# Altium PCB sheet_pwm.PcbDoc
Units mm, origin at the board's own origin, x right, y up, seen from the top; angles counter-clockwise.
Board outline 152.4 x 101.6 mm, 2 copper layers (Top Layer, Bottom Layer); 14 components, 11 nets, 45 pads, 0 vias.
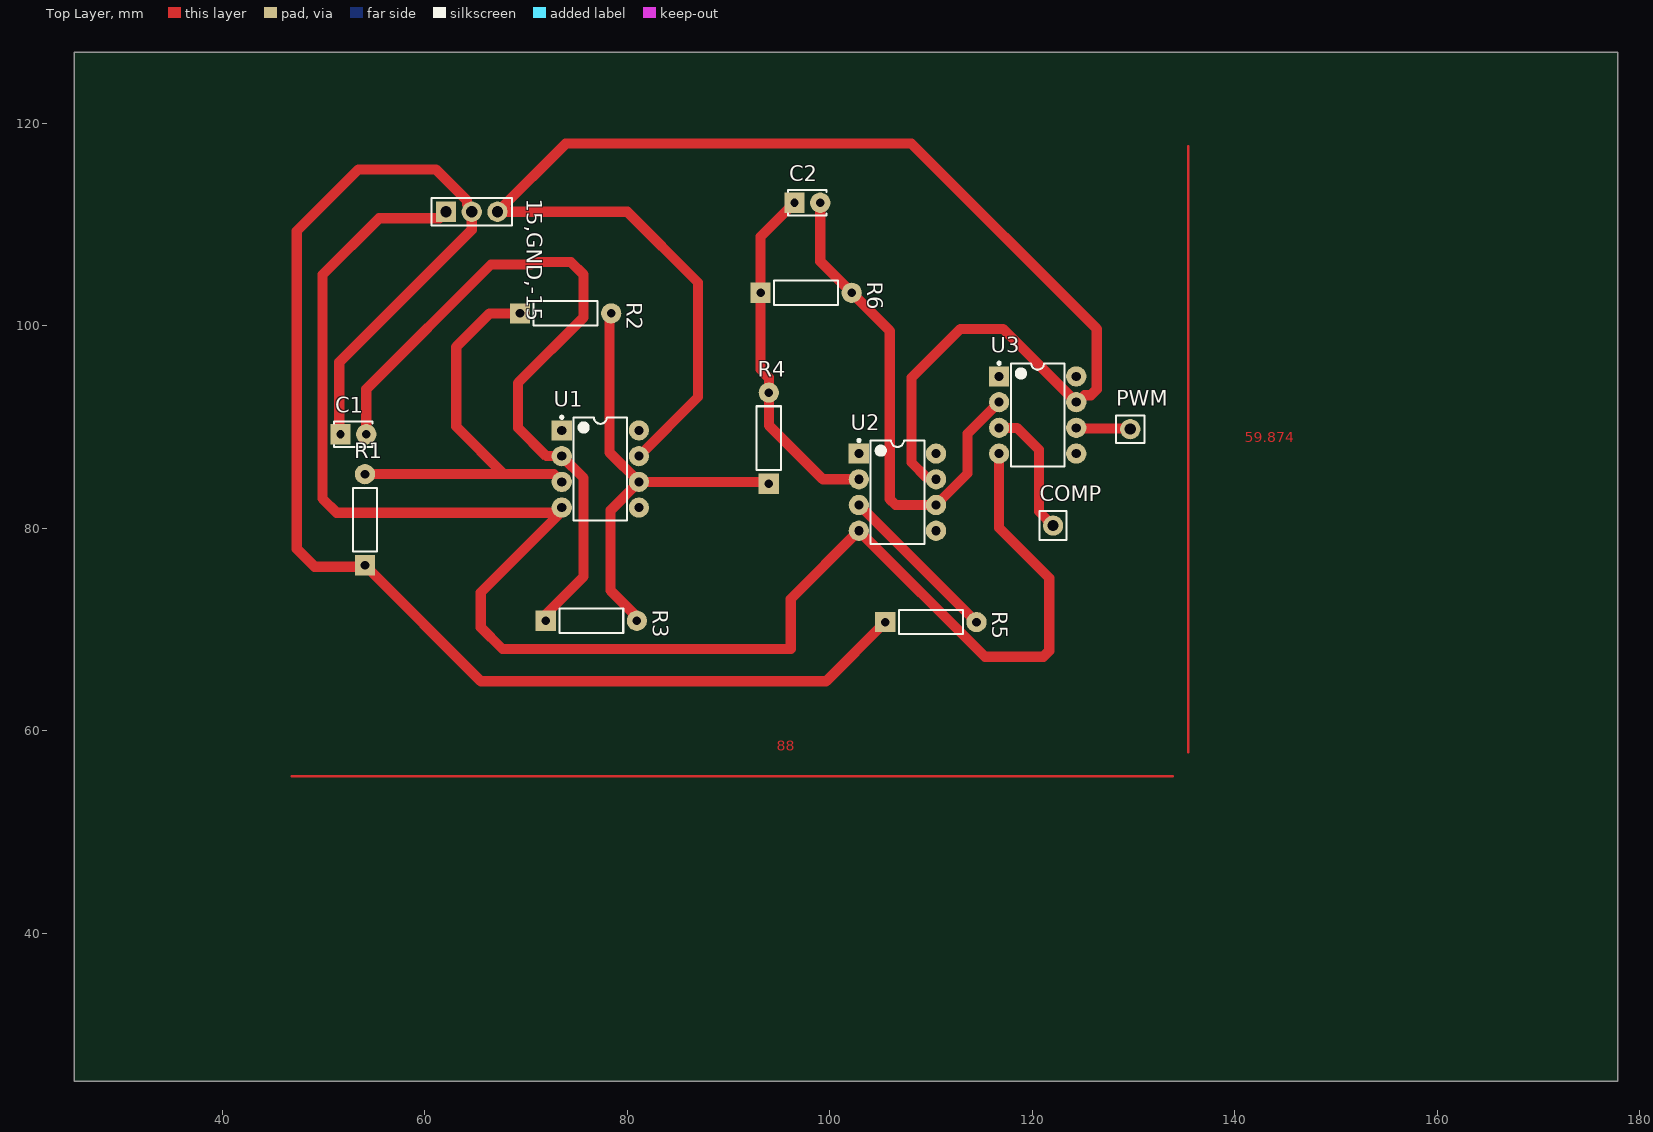
[diagram p0: Top Layer view]
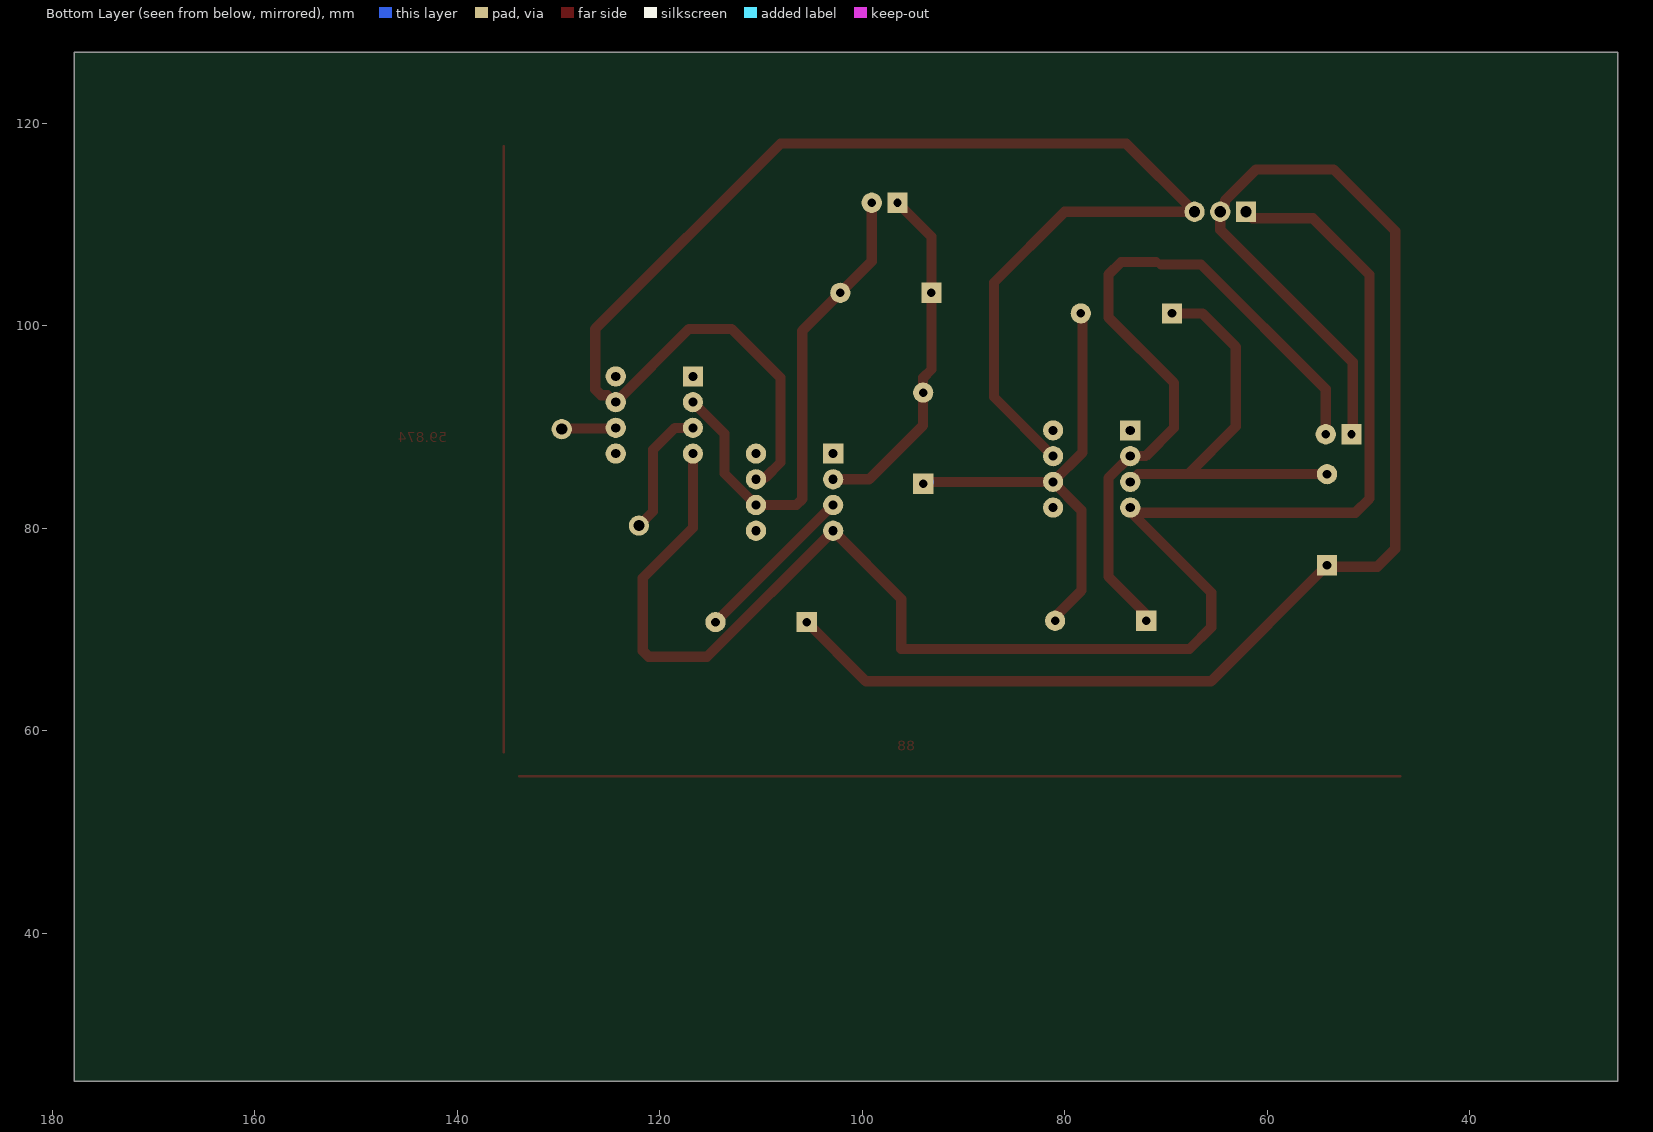
[diagram p1: Bottom Layer view, seen from below]

## Layer stack, top to bottom
Top Solder: solder mask 0.0102, Solder Resist, Dk 3.5
Top Layer: signal copper 0.0356
Dielectric 1: dielectric 0.32, FR-4, Dk 4.8
Bottom Layer: signal copper 0.0356
Bottom Solder: solder mask 0.0102, Solder Resist, Dk 3.5

## Board outline
25.4,25.4 177.8,25.4 177.8,127 25.4,127

## Design rules (kind name [scope] priority, off if disabled: settings)
Clearance [All] p1: gap=0.254 ignorepadtopadclearanceinfootprint=FALSE except(0: Arc-Hole Track-Hole SMDPad-Hole THPad-Hole Via-Hole Fill-Hole Poly-Hole Region-Hole Text-Hole)
PolygonConnect [All] p1: connectstyle=Relief reliefconductorwidth=0.254 reliefentries=4 polygonreliefangle="90 Angle" airgapwidth=0.254
RoutingVias [All] p1: holewidth=0.711 width=1.27 viastyle="Through Hole" minholewidth=0.711 minwidth=1.27 maxholewidth=0.711 maxwidth=1.27
SolderMaskExpansion [All] p1: expansion=0.102 istentingtop=FALSE
Width [All] p1: maxlimit=1 minlimit=0.254 preferedwidth=1
30 further rules are at their usual default settings.

## Classes and differential pairs
component class Sheet_pwm: 15,GND,-15 C1 C2 COMP PWM R1 R2 R3 R4 R5 R6 U1 U3

## Components (designator, comment, footprint, x,y, rotation, side; value= is the part's Value field where it differs from the comment)
15,GND,-15 "61300311121" 61300311121 64.643,111.252 r0 top
C1 "100nF" KEMT-C315-THT-2 52.959,89.281 r0 top
C2 "100nF" KEMT-C315-THT-2 97.79,112.141 r0 top
COMP "61300111121" 61300111121 122.047,80.264 r90 top
PWM "61300111121" 61300111121 129.667,89.789 r0 top
R1 "22K" RESA60-630X240 54.102,80.844 r90 top
R2 "22K" RESA60-630X240 73.914,101.219 r0 top
R3 "4.7K" RESA60-630X240 76.454,70.866 r0 top
R4 "4.7K" RESA60-630X240 93.98,88.9 r90 top
R5 "4.7K" RESA60-630X240 109.982,70.739 r0 top
R6 "47K" RESA60-630X240 97.663,103.251 r0 top
U1 "LM741CN/NOPB" P0008A 77.343,85.852 r0 top
U2 "LM741CN/NOPB" P0008A 106.68,83.566 r0 top
U3 "LM741CN/NOPB" P0008A 120.523,91.186 r0 top

## Footprints (in the part's own frame and the unit in brackets; to place one, negate y for a bottom-side part, rotate by r counter-clockwise, add the part's x,y. Pads: shape width x height; smd on the part's side, far side on the other; paste and mask are expansions set on the pad)
61300111121 [mm] "Pin Header, pitch 2.54 mm, THT, Vertical, single row, 1p"
  round 2 hole 1.1: 1(0,0)
  silkscreen extent -1.42,-1.34 1.42,1.34, body extent -1.27,-1.27 1.27,1.27, height 8.57
61300311121 [mm] "Pin Header, pitch 2.54 mm, THT, Vertical, single row, 3p"
  rect 2x2 hole 1.1: 1(-2.54,0)
  round 2 hole 1.1: 2(0,0) 3(2.54,0)
  silkscreen extent -3.96,-1.34 3.96,1.34, body extent -3.81,-1.27 3.81,1.27, height 8.57
KEMT-C315-THT-2 [mm] "THD, 2-Leads, Body 3.81x2.54mm"
  rect 2x2 hole 0.8: 1(-1.27,0)
  round 2 hole 0.8: 2(1.27,0)
  silkscreen extent -1.91,-1.27 1.91,1.27, body extent -1.91,-1.27 1.91,1.27, height 4.66
P0008A [mm] "DIP, 8-Leads, Body 10.15x6.6mm, Pitch 2.54mm"
  rect 2x2 hole 0.9: 1(-3.81,3.81)
  round 2 hole 0.9: 2(-3.81,1.27) 3(-3.81,-1.27) 4(-3.81,-3.81) 5(3.81,-3.81) 6(3.81,-1.27) 7(3.81,1.27) 8(3.81,3.81)
  silkscreen extent -3.93,-5.1 2.65,5.23, body extent -3.95,-5.07 3.95,5.07, height 5.08
RESA60-630X240 [mm] "Axial Resistor, 2-Leads, Dia 2.4mm, Body Length 6.3mm"
  rect 2x2 hole 0.85: 1(-4.5,0)
  round 2 hole 0.85: 2(4.5,0)
  silkscreen extent -3.15,-1.2 3.15,1.2, body extent -3.15,-1.2 3.15,1.2, height 2.4

## Part data
15,GND,-15: library part CMP-1502-01062-1, "THT Vertical Pin Header WR-PHD, Pitch 2.54 mm, Single Row, 3 pins", Contact Resistance=20mOhm, Manufacturer="Wurth Elektronik", Operating Temperature=-40to105degC, Rated Current=3A, Withstanding Voltage=500VAC, Working Voltage=250VAC, Datasheet URL=https://katalog.we-online.de/em/datasheet/6130xx11121.pdf, Gender=Male, Manufacturer URL=http://www.we-online.de, Mounting Technology=THT, Orientation=Vertical, Package Reference=61300311121, Packaging=Bag, Part Number=61300311121, Pin Number=3, Pitch=2.54mm, Publisher=WurthElektronik, Row Number=Single
C1 C2: library part CMP-1664-00007-1, "Capacitor, Ceramic, 0.01 uF, +/- 10%, 100 V, X7R, -55 to 125 degC, 2-Pin THD, RoHS, Bulk", Case\Package=PDIP, Forward Current="60 mA", Forward Voltage="1.5 V", Max Operating Temperature="100 degC", Max Power Dissipation="400 mW", Min Operating Temperature="-55 degC", Output Voltage="70 V", Package Quantity=2000, Channels=2, ComponentLink1Description="Manufacturer URL", ComponentLink1URL=http://www.kemet.com/, ComponentLink2Description=Datasheet, ComponentLink2URL=http://capacitoredge.kemet.com/capedge2/DataSheet/Datasheet-C315C103K1R5TA.pdf?pn=C315C103K1R5TA{BULK}, DatasheetVersion=Aug-16, Mount="Through Hole", Nominal Vf="1.3 V", PackageDescription="2-Pin Through Hole Device, Body 3.81 x 2.54 mm", PackageReference=C315-THT-2, Packaging=Rail/Tube, Pins=16, Radiation Hardening=No, REACH SVHC=Unknown, RoHSCompliant=true, Vce Max="500 mV"
COMP PWM: library part CMP-1502-01058-1, "THT Vertical Pin Header WR-PHD, Pitch 2.54 mm, Single Row, 1 pins", Contact Resistance=20mOhm, Manufacturer="Wurth Elektronik", Operating Temperature=-40to105degC, Rated Current=3A, Withstanding Voltage=500VAC, Working Voltage=250VAC, Datasheet URL=https://katalog.we-online.de/em/datasheet/6130xx11121.pdf, Gender=Male, Manufacturer URL=http://www.we-online.de, Mounting Technology=THT, Orientation=Vertical, Package Reference=61300111121, Packaging=Bag, Part Number=61300111121, Pin Number=1, Pitch=2.54mm, Publisher=WurthElektronik, Row Number=Single
R1 R2 R3 R4 R5 R6: library part CMP-1659-00075-1, "Axial Resistor, 1 KOhm, +/- 1%, 250 mW, -55 to 155 degC, 2-Pin THD, RoHS, Bulk", Case\Package=Axial, Max Operating Temperature="155 degC", Min Operating Temperature="-55 degC", Package Quantity=200, Power Rating="250 mW", Resistance="10 kohm", Tolerance=1%, Voltage Rating="250 V", ComponentLink1Description="Manufacturer URL", ComponentLink1URL=http://www.yageo.com/, ComponentLink2Description=Datasheet, ComponentLink2URL=http://www.yageo.com/documents/recent/Yageo%20LR_MFR_2013.pdf, DatasheetVersion=Apr-13, Length="0.248 inch", PackageDescription="2-Pin Axial Lead, Dia 2.4 mm, Body Length 6.3 mm", PackageReference=MFR-25, Packaging=Bulk, RoHSCompliant=true
U1 U2 U3: library part CMP-0055-00162-3, "Operational Amplifier, 8-pin MDIP, Pb-Free", Manufacturer="Texas Instruments", Package Reference=P0008A, PackageTopMarking=NSUZXYTTE#*LM*741CN, PowerWise=N, Code_JEDEC=MS-001-BA, ComponentLink1Description="Datasheet URL", ComponentLink1URL=http://www.ti.com/general/docs/lit/getliterature.tsp?genericPartNumber=LM741&fileType=pdf, CompType=Amplifiers, PackageDescription="MDIP, .365 x .250 x .130in, 8 Lead, .100in Pitch", PinCount=8, RoHS=Y

## Nets (pads, with @x,y where several pads share a name; then routed paths per layer and width w, separated by ;. In a path a pad name is that pad's centre, name@x,y a point inside that pad or via, vN(x,y) a via of type N, cw(c..) or ccw(c..) an arc to the next point about the centre after c; other vN are vias at no path point)
+15: 15,GND,-15.1 U1.4 U2.4 U3.4 | length 167.4
  Top Layer w1: 62.103,111.252 61.468,110.617 55.499,110.617 49.911,105.029 49.911,82.931 51.308,81.534 U1.4@73.025,81.534 ; U1.4 73.533,81.705 73.178,81.35 73.178,81.306 65.532,73.66 65.532,70.231 67.691,68.072 96.139,68.072 96.139,73.025 U2.4 115.316,67.31 121.08,67.31 121.666,67.896 121.666,75.092 116.713,80.045 U3.4
-15: 15,GND,-15.3 U1.7 U2.7 U3.7 | length 153.4
  Top Layer w1: U1.7 86.995,92.964 86.995,104.267 80.01,111.252 67.183,111.252 73.914,117.983 108.077,117.983 126.365,99.695 126.365,93.726 125.779,93.14 125.153,93.14 124.468,92.456 U3.7 117.094,99.695 112.903,99.695 108.077,94.869 108.077,86.487 109.537,85.027 110.299,85.027 U2.7
  Bottom Layer w1: U1.7 U1.7@81.391,87.36
GND: 15,GND,-15.2 C1.1 R1.1 R5.1 | length 147.5
  Top Layer w1: C1.1 51.562,89.408 51.562,96.393 64.643,109.474 64.643,111.523 64.193,111.973 64.193,112.337 61.087,115.443 53.467,115.443 47.371,109.347 47.371,77.978 49.149,76.2 53.958,76.2 R1.1 65.549,64.897 99.64,64.897 R5.1
  Bottom Layer w0.254: 64.274,111.821 ccw(c65.742,112.006) 64.516,111.177
NetC1_2: C1.2 R3.1 U1.2 | length 72.5
  Top Layer w1: C1.2 54.229,93.726 66.548,106.045 70.485,106.045 ; 70.993,106.299 74.422,106.299 75.692,105.029 75.692,100.838 69.215,94.361 69.215,89.916 72.009,87.122 U1.2 75.692,84.963 75.692,75.239 R3.1@71.827,71.374
NetC2_1: C2.1 R4.2 R6.1 U2.2 | length 34.8
  Top Layer w1: C2.1 93.163,108.784 R6.1 93.163,95.686 93.98,94.869 R4.2 93.98,90.17 99.314,84.836 U2.2
NetC2_2: C2.2 R6.2 U2.6 U3.2 | length 49.7
  Top Layer w1: C2.2 99.06,106.354 R6.2 105.918,99.496 105.918,82.882 106.504,82.296 U2.6 113.602,85.407 113.602,89.344 U3.2 U3.2@116.687,92.456
NetCOMP_1: COMP.1 U3.3 | length 12.9
  Top Layer w1: U3.3 118.491,89.916 120.65,87.757 120.65,81.661 COMP.1
NetPWM_1: PWM.1 U3.6 | length 5.4
  Top Layer w1: U3.6 124.396,89.852 129.603,89.852 PWM.1
NetR1_2: R1.2 R2.1 U1.3 | length 41.9
  Top Layer w1: R1.2 67.818,85.344 ; R2.1 66.421,101.219 63.119,97.917 63.119,90.043 67.818,85.344 ; U1.3 72.771,85.344 67.818,85.344
NetR2_2: R2.2 R3.2 R4.1 U1.6 | length 46.9
  Top Layer w1: R2.2 78.232,101.037 78.232,87.503 U1.6 ; R3.2@80.827,71.374 78.359,73.842 78.359,81.788 U1.6 ; R4.1 93.798,84.582 U1.6
  Bottom Layer w1: R4.1@93.432,84.582 93.887,84.266 R4.1@93.98,84.201
NetR5_2: R5.2 U2.3 | length 16.4
  Top Layer w1: U2.3 102.898,82.296 114.455,70.739 R5.2
pads on no net: U1.1 U1.5 U1.8 U2.1 U2.5 U2.8 U3.1 U3.5 U3.8
copper on no net: | length 146.8
  Top Layer w0.254: 46.863,55.499 133.858,55.499 ; 135.382,57.912 135.382,117.729

## Other copper
Top Layer:
  text "59.874" at 140.97,88.519 h1
  text "88" at 94.742,58.039 h1